# Altium PCB PCB1.PcbDoc
Units mil, origin at the board's own origin, x right, y up, seen from the top; angles counter-clockwise.
Board outline 3188.98 x 1574.8 mil, 2 copper layers (Top Layer, Bottom Layer); 67 components, 40 nets, 224 pads, 186 vias.
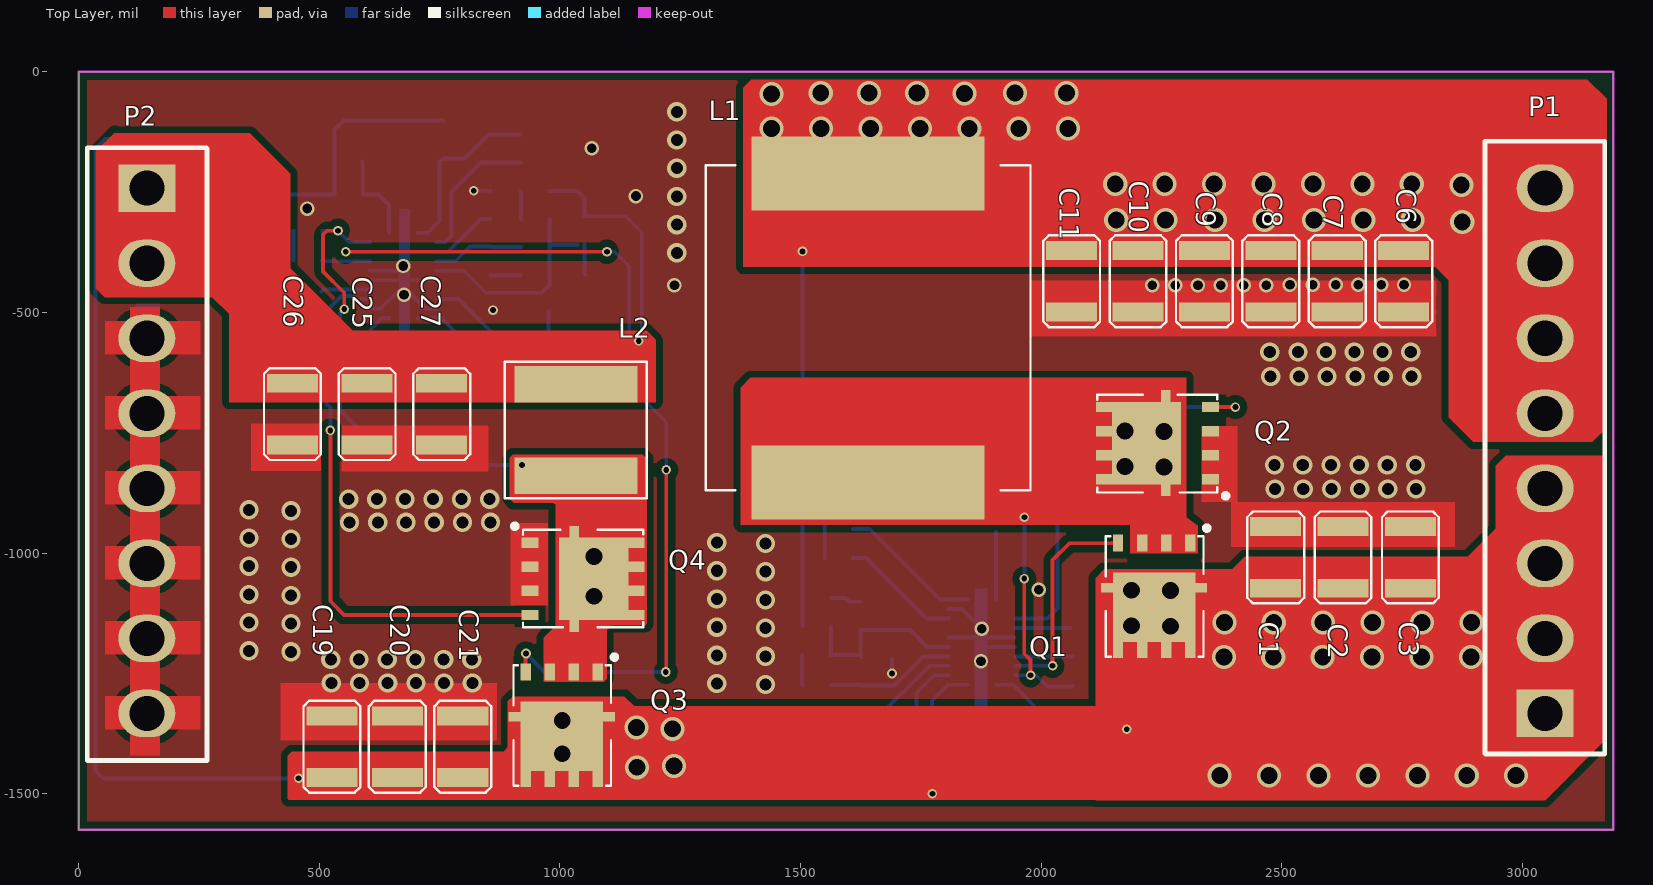
[diagram p0: Top Layer view]
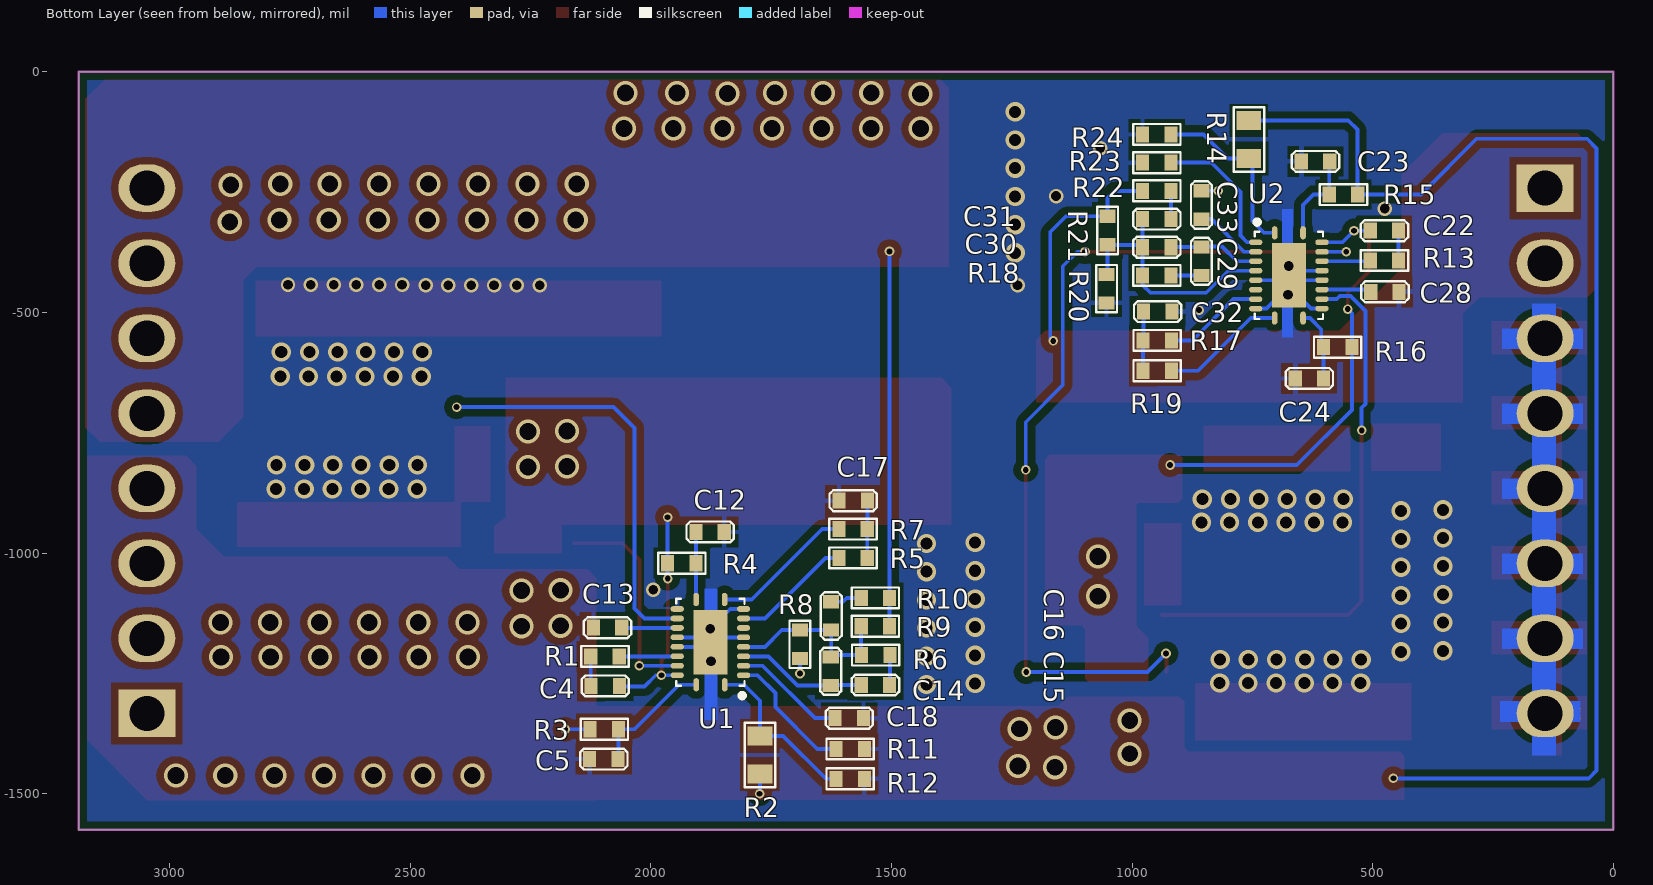
[diagram p1: Bottom Layer view, seen from below]

## Layer stack, top to bottom
Top Layer: signal copper 1.4
Dielectric: dielectric 12.6, FR-4, Dk 4.8
Bottom Layer: signal copper 1.4

## Board outline
0,-1574.8 3188.98,-1574.8 3188.98,0 0,0

## Design rules (kind name [scope] priority, off if disabled: settings)
Clearance Clearance_1 [InPolygon] p1: gap=15
Clearance [All] p2: gap=5
PolygonConnect [IsVia] p1: connectstyle=Direct reliefconductorwidth=10 reliefentries=4 polygonreliefangle="90 Angle"
RoutingVias [All] p1: holewidth=28 width=50 viastyle="Through Hole" minholewidth=28 minwidth=50 maxholewidth=28 maxwidth=50
SilkscreenOverComponentPads [All] p1: minsilkscreentomaskgap=1
SolderMaskExpansion [All] p1: expansion=4
Width [All] p1: maxlimit=200 minlimit=5 preferedwidth=10
27 further rules are at their usual default settings.

## Classes and differential pairs
component class airmachine: C1 C2 C3 C4 C5 C6 C7 C8 C9 C10 C11 C12 C13 C14 C15 C16 C17 C18 L1 Q1 Q2 R1 R2 R3 R4 R5 R6 R7 R8 R9 R10 R11 R12 U1
component class usb: C19 C20 C21 C22 C23 C24 C25 C26 C27 C28 C29 C30 C31 C32 C33 L2 P1 P2 Q3 Q4 R13 R14 R15 R16 R17 R18 R19 R20 R21 R22 R23 R24 U2

## Components (designator, comment, footprint, x,y, rotation, side; value= is the part's Value field where it differs from the comment)
C1 "GRM32ER72A225KA35L" 1210C 2487.26,-1072.94 r90 top
C2 "GRM32ER72A225KA35L" 1210C 2627.26,-1072.94 r90 top
C3 "GRM32ER72A225KA35L" 1210C 2767.26,-1072.94 r90 top
C4 "0.1uF/25V" 0603C 2124.26,-1275.94 r180 bottom
C5 "C1608X7S2A104K080AB" 0603C 2127.26,-1427.94 r180 bottom
C6 "GRM32ER71A476KE15L" 1210C 2753.26,-370.94 r270 top
C7 "GRM32ER71A476KE15L" 1210C 2615.26,-370.94 r270 top
C8 "GRM32ER71A476KE15L" 1210C 2477.26,-370.94 r270 top
C9 "GRM32ER71A476KE15L" 1210C 2339.26,-370.94 r270 top
C10 "GRM32ER71A476KE15L" 1210C 2201.26,-370.94 r270 top
C11 "GRM32ER71A476KE15L" 1210C 2063.26,-370.94 r270 top
C12 "6.8pF/100V" 0603C 1847.26,-955.94 r0 bottom
C13 "EMK107BB7225MA-T" 0603C 2060.26,-1154.94 r0 bottom
C14 "18nF/16V" 0603C 1563,-1274 r180 bottom
C15 "1pF/16V" 0603C 1626.26,-1274.94 r90 bottom
C16 "470pF/16V" 0603C 1625.26,-1159.94 r90 bottom
C17 "2.2uF/16V" 0603C 1550,-891 r0 bottom
C18 "18nF/16V" 0603C 1617.26,-1342.94 r180 bottom
C19 "GRM32ER72A225KA35L" 1210C 526.26,-1466 r90 top
C20 "GRM32ER72A225KA35L" 1210C 662.26,-1466 r90 top
C21 "GRM32ER72A225KA35L" 1210C 798.26,-1466 r90 top
C22 "0.1uF/25V" 0603C 446.26,-330 r0 bottom
C23 "C1608X7S2A104K080AB" 0603C 648.26,-186 r180 bottom
C24 "10pF/100V" 0603C 661.26,-637 r180 bottom
C25 "GRM32ER71A476KE15L" 1210C 599.26,-647 r270 top
C26 "GRM32ER71A476KE15L" 1210C 444.26,-647 r270 top
C27 "GRM32ER71A476KE15L" 1210C 754.26,-647 r270 top
C28 "EMK107BB7225MA-T" 0603C 504.26,-457 r180 bottom
C29 "10nF/16V" 0603C 856,-364 r270 bottom
C30 "1pF/16V" 0603C 919.2,-364.4 r0 bottom
C31 "220pF/16V" 0603C 978.26,-305.8 r180 bottom
C32 "2.2uF/16V" 0603C 976.31,-498 r180 bottom
C33 "18nF/16V" 0603C 856,-306 r90 bottom
L1 "IHLP6767GZER4R7M" IHLP-6767GZ 1640.26,-531.94 r90 top
L2 "XAL7030-272MEB" XAL7030 1033.26,-839 r90 top
P1 "Header 8" CH3.96-8P 3047.24,-1333.07 r90 top locked
P2 "Header 8" CH3.96-8P 141.73,-241.73 r270 top locked
Q1 "BSC117N08NS5ATMA1" "PowerPAK SO-8" 2336.26,-941.94 r270 top
Q2 "BSC037N08NS5ATMA1" "PowerPAK SO-8" 2389.26,-872.94 r180 top
Q3 "BSC117N08NS5ATMA1" "PowerPAK SO-8" 1105.26,-1210 r270 top
Q4 "BSC037N08NS5ATMA1" "PowerPAK SO-8" 900.26,-952 r0 top
R1 "0" 0603R 2124.88,-1214.72 r180 bottom
R2 "121K" 0805R 1773.26,-1379.94 r270 bottom
R3 "2.2" 0603R 2126.26,-1365.94 r180 bottom
R4 "1.65K" 0603R 1965.26,-1020.94 r180 bottom
R5 "20K" 0603R 1609.26,-1009.94 r180 bottom
R6 "2.37K" 0603R 1562.26,-1211.94 r180 bottom
R7 "20K" 0603R 1609.26,-949.94 r180 bottom
R8 "1.27K" 0603R 1690.26,-1159.94 r270 bottom
R9 "18K" 0603R 1504,-1152 r0 bottom
R10 "19.1" 0603R 1504,-1093 r0 bottom
R11 "28.7K" 0603R 1556.26,-1406.94 r0 bottom
R12 "8.06K" 0603R 1556.26,-1468.94 r0 bottom
R13 "0" 0603R 446.26,-392 r0 bottom
R14 "121K" 0805R 757.26,-180 r90 bottom
R15 "2.2" 0603R 531.26,-255 r0 bottom
R16 "845" 0603R 543.26,-572 r0 bottom
R17 "20K" 0603R 918.31,-558 r0 bottom
R18 "2.15K" 0603R 978.26,-423 r180 bottom
R19 "20K" 0603R 918.31,-621 r0 bottom
R20 "3.4k" 0603R 1053,-421 r270 bottom
R21 "18K" 0603R 1051,-300 r270 bottom
R22 "39.2" 0603R 978.26,-247.2 r180 bottom
R23 "18.2K" 0603R 978.26,-188.6 r180 bottom
R24 "8.06K" 0603R 978.26,-130 r180 bottom
U1 "LM5145" QFN050P600-8N 1876.26,-1184.94 r0 bottom
U2 "LM5145" QFN050P600-8N 674.26,-423 r180 bottom

## Footprints (in the part's own frame and the unit in brackets; to place one, negate y for a bottom-side part, rotate by r counter-clockwise, add the part's x,y. Pads: shape width x height; smd on the part's side, far side on the other; paste and mask are expansions set on the pad)
0603C [mm]
  rect 0.7x0.85 smd: 1(0,0) 2(1.5,0)
  silkscreen extent -0.5,-0.55 2,0.55
0603R [mm]
  rect 0.7x0.85 smd: 1(0,0) 2(1.5,0)
  silkscreen extent -0.5,-0.55 2,0.55
0805R [mm]
  rect 1x1.3 smd: 1(0,0) 2(2,0)
  silkscreen extent -0.7,-0.8 2.7,0.8
1210C [mm]
  rect 1x2.7 smd: 1(0,0) 2(3.25,0)
  silkscreen extent -0.8,-1.5 4.05,1.5
CH3.96-8P [mm]
  rect 2.5x3 hole 1.85: 1(0,0)
  oval 2.5x3 hole 1.85: 2(3.96,0) 3(7.92,0) 4(11.88,0) 5(15.84,0) 6(19.8,0) 7(23.76,0) 8(27.72,0)
  silkscreen extent -2.14,-3.15 30.2,3.18
IHLP-6767GZ [mm]
  rect 3.9x12.32 smd: 1(-8.155,0) 2(8.155,0)
  silkscreen extent -8.57,-8.57 8.57,8.57
"PowerPAK SO-8" [mm]
  rect 0.9x0.54 smd: 1(0.95,-0.67) 2(0.95,-1.94) 3(0.95,-3.21) 4(0.95,-4.48) 5(6.548,-4.48) 6(6.548,-3.21) 7(6.548,-1.94) 8(6.548,-0.67)
  rect 0.5x1.6 smd: 5(3.3,-4.575) 8(3.3,-0.575)
  rect 3.66x2.5 smd: 5(4.325,-3.495)
  rect 3.66x2 smd: 8(4.325,-1.401)
  silkscreen extent 0.03,-5.12 6.93,0.33
QFN050P600-8N [mm]
  oval 0.3x0.7 smd: 1(-0.75,2.25) 10(-0.75,-2.25) 11(0.75,-2.25) 20(0.75,2.25)
  oval 0.7x0.3 smd: 2(-1.75,1.75) 3(-1.75,1.25) 4(-1.75,0.75) 5(-1.75,0.25) 6(-1.75,-0.25) 7(-1.75,-0.75) 8(-1.75,-1.25) 9(-1.75,-1.75) 12(1.75,-1.75) 13(1.75,-1.25) 14(1.75,-0.75) 15(1.75,-0.25) 16(1.75,0.25) 17(1.75,0.75) 18(1.75,1.25) 19(1.75,1.75)
  rect 1.8x3.4 smd: 21(0,0)
  silkscreen extent -1.8,-2.3 1.8,2.94, body extent -1.8,-2.3 1.8,2.3, height 0.8
XAL7030 [mm]
  rect 1.92x6.5 smd: 1(0,0) 2(4.82,0)
  silkscreen extent -1.19,-3.74 6.01,3.76

## Part data
C1 C2 C3 C4 C5 C6 C7 C8 C9 C10 C11 C12 C13 C14 C15 C16 C17 C18 C19 C20 C21 C22 C23 C24 C25 C26 C27 C28 C29 C30 C31 C32 C33: library part 0.01UF, "CCX85-103"
L1 L2: library part INDUCTOR
P1 P2: "Header, 8-Pin"
Q1 Q2 Q3 Q4: library part Si4004DY, "Si4004DY"
R1 R4 R6 R8 R9 R10 R13 R16 R18 R20 R21 R22: library part Res3, "Resistor"
R2 R3 R5 R7 R11 R12 R14 R15 R17 R19 R23 R24: library part "Res Semi", "Semiconductor Resistor"

## Via types
v1: diameter 40, hole 25, Top Layer to Bottom Layer, tented both sides, 78 vias
v2: diameter 50, hole 35, Top Layer to Bottom Layer, tented both sides, 65 vias
v3: diameter 20, hole 12, Top Layer to Bottom Layer, tented both sides, 22 vias
v4: diameter 30, hole 20, Top Layer to Bottom Layer, tented both sides, 21 vias

## Nets (pads, with @x,y where several pads share a name; then routed paths per layer and width w, separated by ;. In a path a pad name is that pad's centre, name@x,y a point inside that pad or via, vN(x,y) a via of type N, cw(c..) or ccw(c..) an arc to the next point about the centre after c; other vN are vias at no path point)
+5V: C25.1 C26.1 C27.1 L2.2 P2.1 P2.2 R21.1 R22.1 | length 478
  Bottom Layer w8: R22.1 1036.2,-247.2 1051,-262 R21.1 1137,-300 1170,-333 1170,-553 v3(1164,-559)
AGND1: C1.2 C2.2 C3.2 C5.1 C6.2 C7.2 C8.2 C9.2 C10.2 C11.2 C12.1 C13.2 C17.2 C18.2 C19.2 C20.2 C21.2 C23.1 C24.1 C25.2 C26.2 C27.2 C28.2 C32.2 C33.2 P2.3 P2.4 P2.5 P2.6 P2.7 P2.8 Q2.1 Q2.2 Q2.3 Q4.1 Q4.2 Q4.3 R8.2 R11.1 R12.1 R20.2 R23.1 R24.1 U1.6 U1.9 U1.12 U1.15 U1.16 U1.21 U2.6 U2.9 U2.12 U2.15 U2.16 U2.21 | length 816.3
  Bottom Layer w8: U2.12 627.9,-491.9 628,-492 U2.21@674.26,-445.74 ; U2.15 664.42,-432.84 U2.21 ; U2.16 664.42,-413.16 U2.21 ; U2.9 721.1,-491.9 721,-492 674.26,-445.26 U2.21 ; U2.6 684.1,-432.84 U2.21 ; v3@821,-247 v3(821.06,-246.94) C33.2 ; v3(1690,-1250) 1690.26,-1249.74 R8.2 ; U1.6 1866.42,-1175.09 U1.21 ; U1.9 1835.04,-1116.04 v4(1876.26,-1157.26) U1.21 ; U1.16 1886.1,-1194.78 U1.21 ; U1.15 1886.1,-1175.09 U1.21
  other v1: 1427,-1273 1326,-1271 525,-1270 583.6,-1270 642.2,-1270 700.8,-1270 759.4,-1270 818,-1270 524,-1221 582.6,-1221 641.2,-1221 699.8,-1221 758.4,-1221 817,-1221 1427,-1214.4 1326,-1212.4 441,-1205 354,-1203 1427,-1155.8 1326,-1153.8 441,-1146.4 354,-1144.4 1427,-1097.2 1326,-1095.2 441,-1087.8 354,-1085.8 1427,-1038.6 1326,-1036.6 441,-1029.2 354,-1027.2 1427,-980 1326,-978 441,-970.6 354,-968.6 563,-936 621.6,-936 680.2,-936 738.8,-936 797.4,-936 856,-936 441,-912 354,-910 561,-888 619.6,-888 678.2,-888 736.8,-888 795.4,-888 854,-888 2486,-867 2544.6,-867 2603.2,-867 2661.8,-867 2720.4,-867 2779,-867 2485,-817 2543.6,-817 2602.2,-817 2660.8,-817 2719.4,-817 2778,-817 2477,-633 2535.6,-633 2594.2,-633 2652.8,-633 2711.4,-633 2770,-633 2475,-582 2533.6,-582 2592.2,-582 2650.8,-582 2709.4,-582 2768,-582 1243,-376 1243,-317.4 1243,-258.8 1243,-200.2 1243,-141.6 1243,-83
  other v3: 861,-495
  other v4: 1875,-1225 1995,-1076 676,-463 1238.03,-443 2231,-443 2278.4,-443 2325.8,-443 2373.2,-443 2420.6,-443 2468,-443 2517,-442 2564.4,-442 2611.8,-442 2659.2,-442 2706.6,-442 2754,-442 674.26,-403.31 475,-284 1158,-258 1066,-159
NetC4_1: C4.1 R1.1 | length 61.5
  Bottom Layer w8: C4.1 2124.88,-1275.32 R1.1
NetC4_2: C4.2 L1.1 Q1.1 Q1.2 Q1.3 Q2.5 Q2.6 Q2.7 Q2.8 R4.1 U1.19 | length 452.3
  Top Layer w8: v3(1965,-1053) 1965,-1209 1978,-1222 v3(1978,-1253.83)
  Bottom Layer w8: U1.19 v3(1978,-1253.83) ; v3(1965,-1053) 1965.26,-1052.74 R4.1 v3(1965.26,-925.26) ; 1989.83,-1253.83 2013,-1277 2064.14,-1277 C4.2
  other v2: 2255,-821 2174,-820 2255,-747 2174,-746
NetC5_2: C5.2 R3.2 U1.20 | length 262.1
  Bottom Layer w8: U1.20 1941.52,-1273.52 2033.94,-1365.94 R3.2 2067.2,-1426.94 C5.2
NetC12_2: C12.2 R4.2 U1.11 | length 140.6
  Bottom Layer w8: U1.11 1906.2,-1095.94 R4.2 1906.31,-1020.83 C12.2
NetC14_1: C14.1 C15.1 U1.4 | length 269.8
  Bottom Layer w8: C14.1 1625.32,-1274 C15.1 1695.06,-1274.94 1755.54,-1214.46 U1.4
NetC14_2: C14.2 R6.2 | length 62.4
  Bottom Layer w8: R6.2 1503.2,-1273.26 C14.2
NetC15_2: C15.2 C16.1 R6.1 R8.1 R9.2 U1.5 | length 377.4
  Bottom Layer w8: R9.2 1563.06,-1211.14 R6.1 1622.31,-1211.94 C15.2@1625.26,-1214.88 ; C15.2 C15.2@1625.26,-1214.88 ; U1.5 1762.78,-1194.78 1727.94,-1159.94 R8.1 C16.1 C15.2@1625.26,-1214.88
NetC16_2: C16.2 R10.2 | length 65.5
  Bottom Layer w8: R10.2 1593,-1093 1600.88,-1100.88 C16.2
NetC17_1: C17.1 R5.2 R7.2 | length 119
  Bottom Layer w8: C17.1 1550,-949.73 R7.2 R5.2
NetC18_1: C18.1 U1.3 | length 235.2
  Bottom Layer w8: C18.1 1659.06,-1342.94 1767.85,-1234.15 U1.3
NetC22_1: C22.1 R13.1 | length 62
  Bottom Layer w8: R13.1 C22.1
NetC22_2: C22.2 L2.1 Q3.1 Q3.2 Q3.3 Q4.5 Q4.6 Q4.7 Q4.8 R16.1 U2.19 | length 955.7
  Top Layer w8: v3(539,-330) 516,-330 508,-338 508,-415 552,-459 v3(552,-493)
  Bottom Layer w8: C22.2 v3(539,-330) 563.1,-354.1 U2.19 ; v3(552,-493) 543.26,-501.74 R16.1 543.26,-702.26 658,-817 v3(921,-817)
  other v2: 1070.54,-1089.59 1070.54,-1007.17
NetC23_2: C23.2 R15.2 U2.20 | length 190.6
  Bottom Layer w8: C23.2 590.31,-187.11 R15.2 623,-255 644.73,-276.73 U2.20
NetC24_2: C24.2 R16.2 U2.11 | length 151.4
  Bottom Layer w8: C24.2 602.2,-572.11 R16.2 607,-567.31 607,-535 630.42,-511.58 U2.11
NetC29_1: C29.1 C30.1 U2.4 | length 189.2
  Bottom Layer w8: U2.4 782.53,-393.47 813,-363 855,-363 C29.1 918.8,-364 C30.1
NetC29_2: C29.2 R18.2 | length 63.2
  Bottom Layer w8: C29.2 919.15,-423.06 R18.2
NetC30_2: C30.2 C31.1 R18.1 R20.1 R21.2 U2.5 | length 520.4
  Bottom Layer w8: U2.5 800.16,-413.16 846,-459 962,-459 978.26,-442.74 R18.1 C30.2 ; C31.1 C30.2 ; R21.2@1036.26,-359.94 982.71,-359.94 C30.2 ; R21.2 1051,-419 R20.1
NetC31_2: C31.2 R22.2 | length 58.6
  Bottom Layer w8: C31.2 R22.2
NetC32_1: C32.1 R17.2 R19.2 | length 123.4
  Bottom Layer w8: C32.1 976.31,-556.94 R17.2 R19.2
NetC33_1: C33.1 U2.3 | length 140.9
  Bottom Layer w8: U2.3 767.6,-373.79 835.38,-306 C33.1
NetQ1_4: Q1.4 U1.18 | length 449.4
  Top Layer w8: v3(2023.85,-1234.15) 2023.85,-1014.15 2058.66,-979.34 Q1.4
  Bottom Layer w8: U1.18 v3(2023.85,-1234.15) v3@2024,-1234
NetQ2_4: Q2.4 U1.13 | length 911.7
  Top Layer w8: Q2.4 v3(2403.56,-696.56)
  Bottom Layer w8: U1.13 2013.28,-1135.72 2034,-1115 2034,-740 2077.44,-696.56 v3(2403.56,-696.56)
NetQ3_4: Q3.4 U2.18 | length 1873.3
  Top Layer w8: v3(554.79,-373.79) v3(1097.79,-373.79) v3@1098,-374 ; Q3.4 928.88,-1221.12 929,-1221 v3@929,-1208.5 ; v3(1220,-1247) 1221,-1246 v3(1221,-827)
  Bottom Layer w8: v3(554.79,-373.79) U2.18 ; v3(929.5,-1208.5) 968,-1247 v3(1220,-1247) ; v3(1097.79,-373.79) 1113.79,-373.79 1144,-404 1144,-651 1221,-728 v3(1221,-827)
NetQ4_4: Q4.4 U2.13 | length 1138.9
  Top Layer w8: v3(523,-745) 523,-1100 551.38,-1128.38 Q4.4
  Bottom Layer w8: v3(523,-745) 523,-698 515,-690 515,-497 546.47,-465.53 568,-465.53 574.69,-472.21 U2.13
NetR1_2: R1.2 U1.17 | length 120.8
  Bottom Layer w8: U1.17 2065.57,-1214.46 R1.2
NetR2_1: R2.1 R12.2 U1.1 | length 355.2
  Bottom Layer w8: R12.2 1636.06,-1468.94 1725.06,-1379.94 R2.1 1773.26,-1306.74 1806.48,-1273.52 U1.1
NetR5_1: R5.1 U1.8 | length 250.2
  Bottom Layer w8: R5.1 1636.94,-1009.94 1762.72,-1135.72 U1.8
NetR7_1: R7.1 U1.10 | length 298.1
  Bottom Layer w8: R7.1 1643.94,-949.94 1790.35,-1096.35 U1.10
NetR11_2: R11.2 U1.2 | length 272.6
  Bottom Layer w8: R11.2 1654.26,-1406.94 1739.1,-1322.1 1741,-1320.2 1741,-1291 1778.17,-1253.83 U1.2
NetR13_2: R13.2 U2.17 | length 100.7
  Bottom Layer w8: R13.2 506.79,-393.47 U2.17
NetR14_1: R14.1 R24.2 U2.1 | length 372
  Bottom Layer w8: U2.1 725.58,-334.42 750,-310 750,-187.26 R14.1 802,-180 852,-130 R24.2
NetR17_1: R17.1 U2.8 | length 210.7
  Bottom Layer w8: U2.8 789.21,-472.21 875,-558 R17.1
NetR19_1: R19.1 U2.10 | length 259.8
  Bottom Layer w8: U2.10 753.58,-511.58 863,-621 R19.1
NetR23_2: R23.2 U2.2 | length 298
  Bottom Layer w8: U2.2 761,-354.1 775,-340.1 775,-249 835.4,-188.6 R23.2
VCC_12_24: C6.1 C7.1 C8.1 C9.1 C10.1 C11.1 L1.2 P1.5 P1.6 P1.7 P1.8 R9.1 R10.1 | length 779
  Bottom Layer w8: R9.1 R10.1 v3(1504,-373)
  other v2: 2875,-312 2156,-308 2258.67,-308 2361.33,-308 2464,-308 2566.67,-308 2669.33,-308 2772,-308 2873,-235 2154,-233 2256.67,-233 2359.33,-233 2462,-233 2564.67,-233 2667.33,-233 2770,-233 1440,-118 1542.67,-118 1645.33,-118 1748,-118 1850.67,-118 1953.33,-118 2056,-118 1440,-46 1841,-45 1542,-44 1642,-44 1742,-44 1946,-44 2053,-44
VCC_L1: C28.1 U2.14 | length 103
  Bottom Layer w8: C28.1 508.73,-452.53 U2.14
VCC_L2: C13.1 U1.14 | length 115.3
  Bottom Layer w8: U1.14 2059.79,-1155.41 C13.1
VIN: C1.1 C2.1 C3.1 C19.1 C20.1 C21.1 P1.1 P1.2 P1.3 P1.4 Q1.5 Q1.6 Q1.7 Q1.8 Q3.5 Q3.6 Q3.7 Q3.8 R2.2 R3.1 R14.2 R15.1 | length 2735.7
  Bottom Layer w8: v3(457,-1468) 51,-1468 35,-1452 35,-159 55,-139 284,-139 400,-255 R15.1 532,-254.26 532,-120 550.74,-101.26 R14.2 ; v3@1773,-1500 1773.26,-1499.74 R2.2 ; R3.1 v3(2177.94,-1365.94) v3@2178,-1366
  other v2: 2371,-1462 2473.67,-1462 2576.33,-1462 2679,-1462 2781.67,-1462 2884.33,-1462 2987,-1462 1160,-1445 1237,-1442 1005,-1417 1234,-1365 1159,-1362 1005,-1348 2379.67,-1216 2482.33,-1216 2585,-1216 2687.67,-1216 2790.33,-1216 2893,-1216 2269,-1152 2188,-1151 2380.67,-1144 2483.33,-1144 2586,-1144 2688.67,-1144 2791.33,-1144 2894,-1144 2269,-1078 2188,-1077
  other v3: 1774,-1500
pads on no net: U1.7 U2.7

## Polygon pours and split planes (outlines as drawn)
AGND1 on Top Layer "Top Layer-No Net" (solid, remove dead copper, pour order 1000): -151,199 3311,199 3311,-1804 -89,-1804 -174,-1719 -96,-1641 -96,198
AGND1 on Bottom Layer "Top Layer-No Net" (solid, remove dead copper, pour order 1001): -104,94 -99,89 3239,89 3239,-1709 3254,-1724 3204,-1674 -84,-1674 -84,74 -64,94

## Keep-outs
Keep-Out Layer:
  the board outline again, w5

## Other copper
Top Layer:
  rectangle net AGND1: 54.37,-587.47 253,-517.7
  rectangle net AGND1: 54.37,-743.38 253,-673.6
  rectangle net AGND1: 54.37,-899.28 253,-829.51
  rectangle net AGND1: 54.37,-1055.19 253,-985.42
  rectangle net AGND1: 54.37,-1211.09 253,-1141.32
  rectangle net AGND1: 107.2,-1421 169,-489.02
  rectangle net AGND1: 54.37,-1367 253,-1297.23
  rectangle net AGND1: 419,-1389 869,-1270
  rectangle net AGND1: 358,-829.51 503.63,-731
  rectangle net AGND1: 546.55,-830 852,-735.25
  rectangle net AGND1: 1977.86,-550 2822,-433
  rectangle net AGND1: 2394,-987 2860,-894
  rectangle net AGND1: 2333,-894 2408,-736
  rectangle net AGND1: 897,-1109 975.71,-937
  region net VIN: 3171.26,-798 2965,-798 2945,-818 2945,-949.24 2886.24,-1008 2423,-1008 2397,-1034 2131,-1034 2113,-1052 2113,-1513 3047.26,-1513 3171.26,-1389
  region net NetC4_2: 2185,-941 2185,-1000 2325,-1000 2325,-943 2302,-925 2302,-636 1396,-636 1376,-656 1376,-941 1377,-942
  region net VCC_12_24: 1381,-33 1398,-16 3135,-16 3175,-56 3175,-739 3145,-769 2898,-769 2847,-718 2847,-433 2819,-405 1381,-405
  region net VIN: 883,-1413 892,-1403 892,-1308 903,-1297 904,-1298 1134,-1298 1154,-1318 2138,-1318 2138,-1512 437,-1512 435,-1510 435,-1421 443,-1413
  region net NetC22_2: 966,-1267 1091,-1267 1097,-1261 1097,-1159 1106,-1150 1177,-1150 1180,-1147 1180,-804 1172,-796 902,-796 896,-802 896,-887 904,-895 986,-895 992,-901 991,-902 991,-1151 966,-1176
  region net +5V: 1199,-686 313,-686 313,-503 278,-468 54,-468 36,-450 36,-165 75,-126 77,-128 356,-128 440,-212 440,-408 570,-538 1180,-538 1199,-557
Bottom Layer:
  rectangle net AGND1: 119,-1421 169,-481
  rectangle net AGND1: 68,-1350.53 236,-1307.53
  rectangle net AGND1: 63,-1199.62 231,-1156.62
  rectangle net AGND1: 63,-1043.72 231,-1000.72
  rectangle net AGND1: 63,-887.81 231,-844.81
  rectangle net AGND1: 63,-731.91 231,-688.91
  rectangle net AGND1: 63,-576 231,-533
  rectangle net AGND1: 1861.8,-1347 1888,-1073.41
  rectangle net AGND1: 666.05,-552 689,-285

## Silkscreen, mask and mechanical layers (free items; w line width, h text height)
Top Solder:
  rectangle: 2080,-187 2904,-26
Mechanical 1:
  the board outline again, w5